# Altium PCB E3e-B2_ANGERS.PcbDoc
Units mil, origin at the board's own origin, x right, y up, seen from the top; angles counter-clockwise.
Board outline 5190 x 3405 mil, 2 copper layers (Top Layer, Bottom Layer); 19 components, 22 nets, 73 pads, 0 vias.
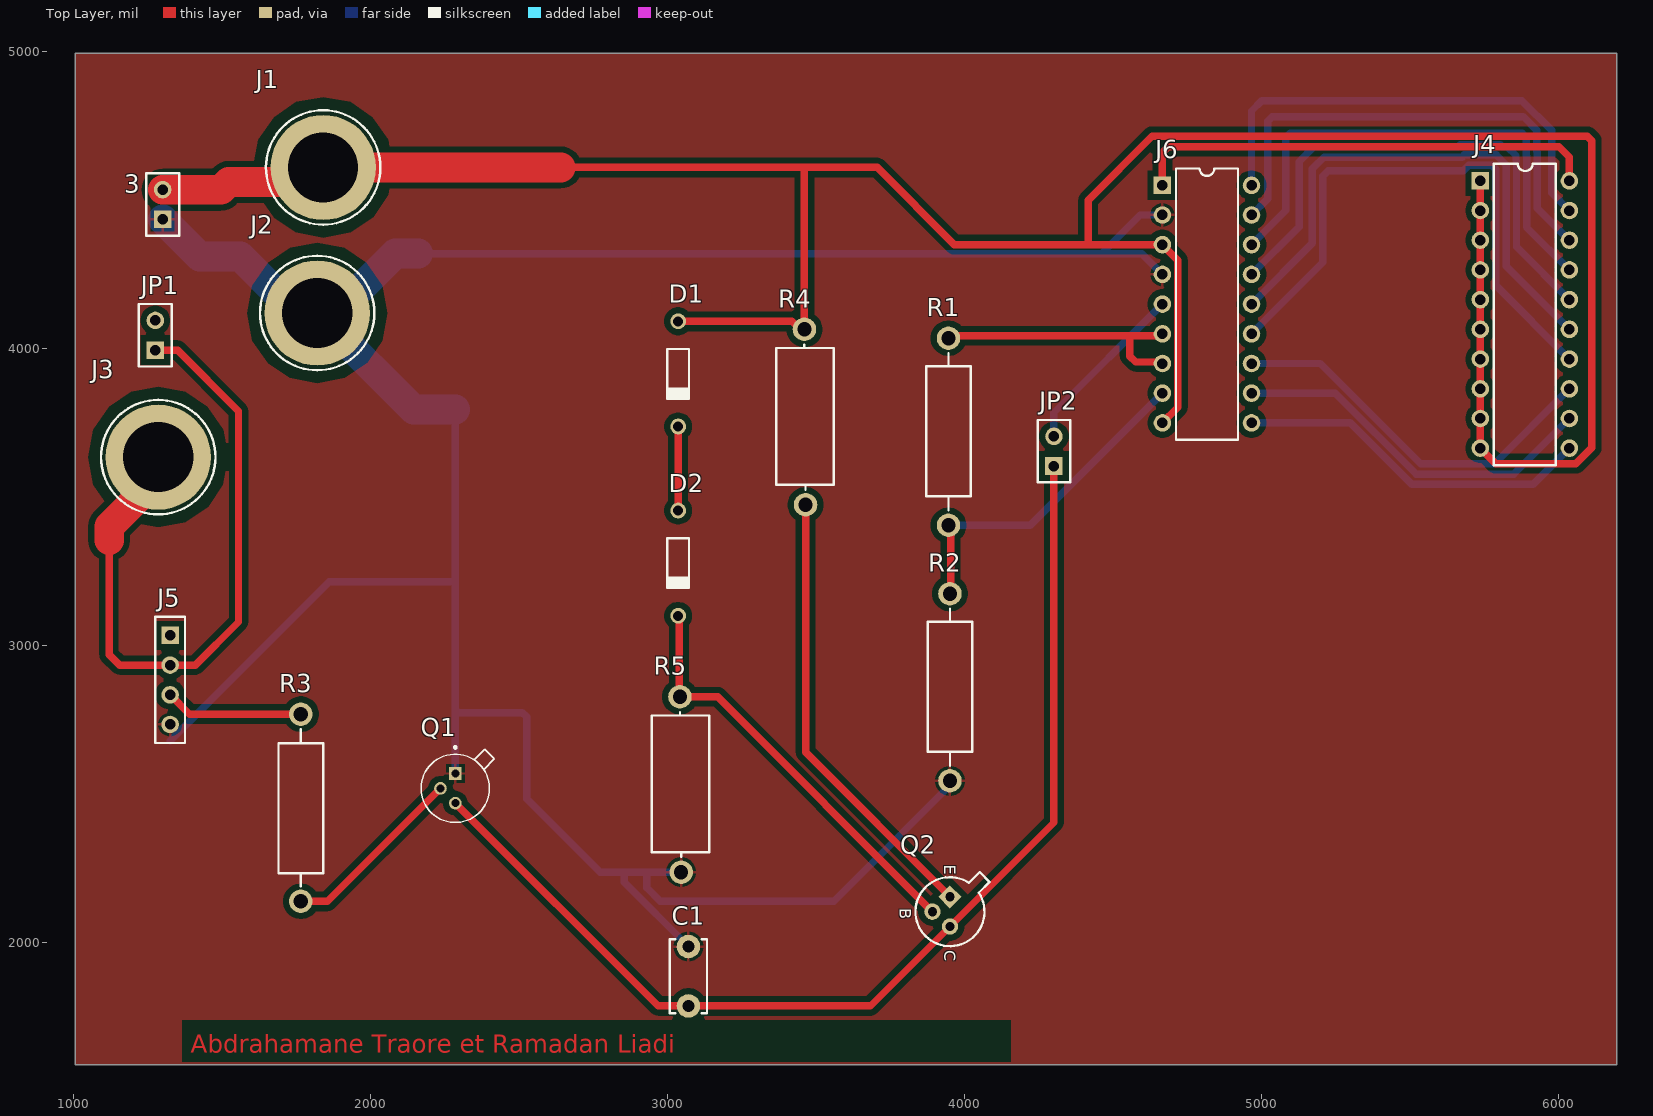
[diagram p0: Top Layer view]
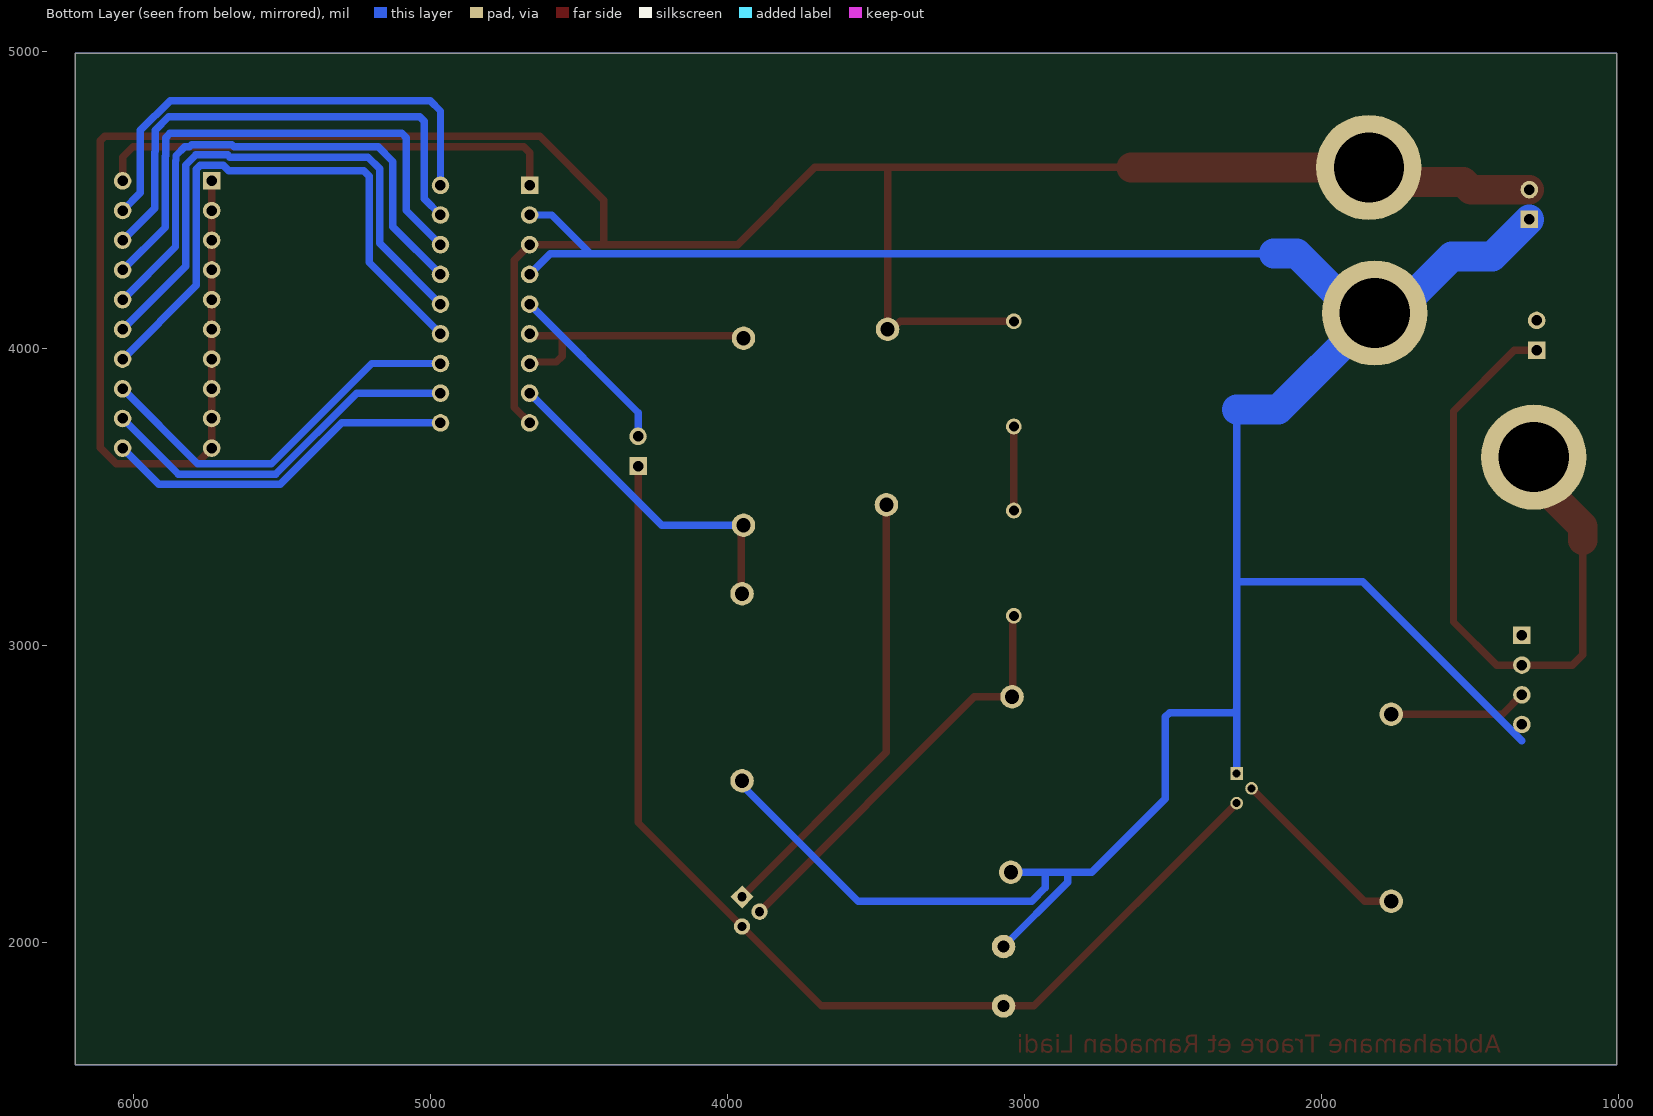
[diagram p1: Bottom Layer view, seen from below]
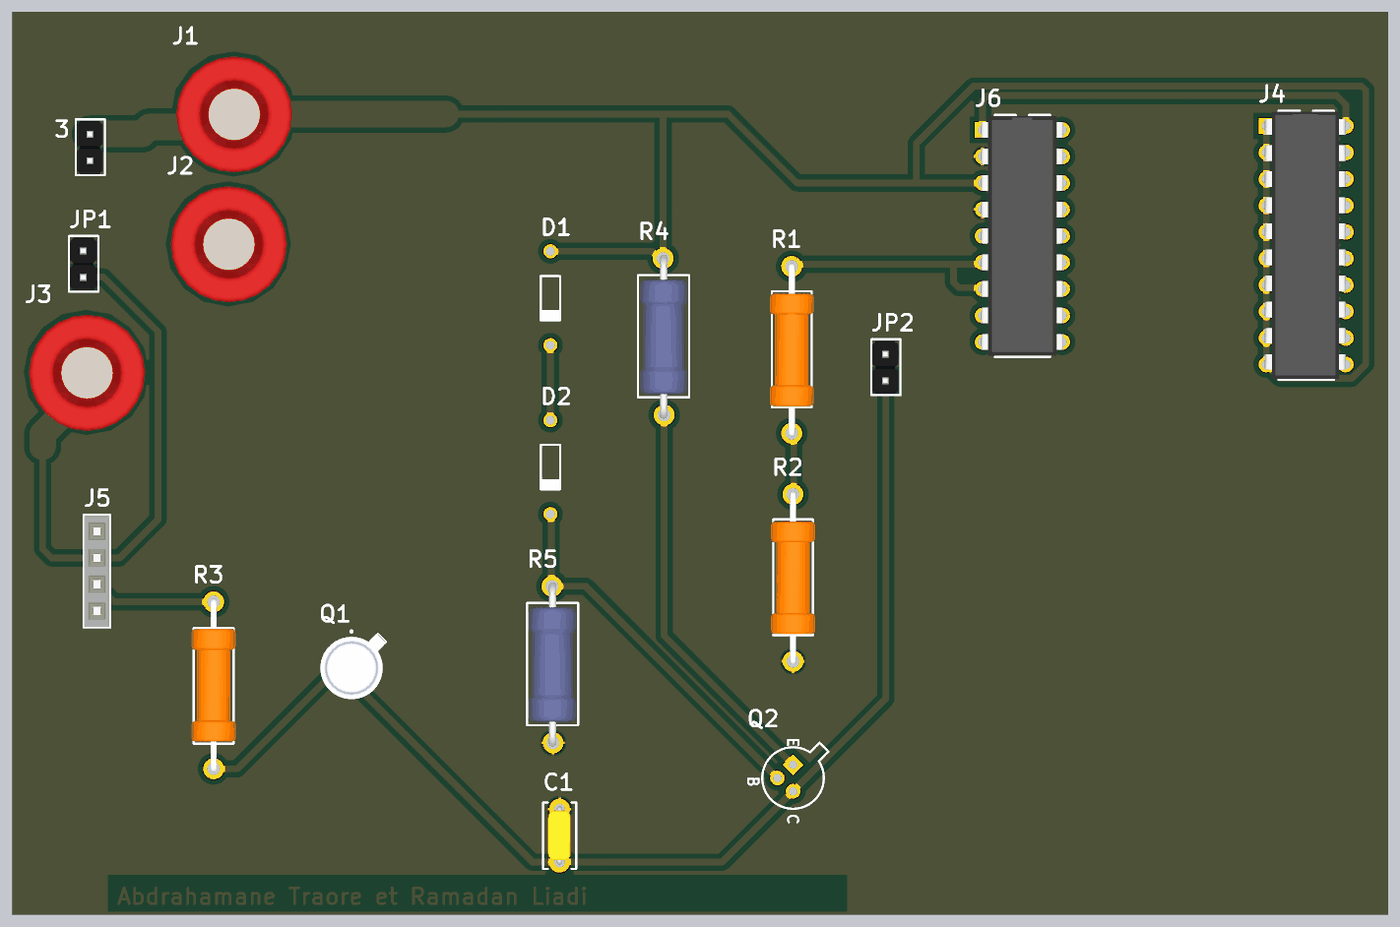
[diagram p2: 3D render of the assembled board from above, using the file's embedded part models]

## Layer stack, top to bottom
Top Solder: solder mask 0.4, Solder Resist, Dk 3.5
Top Layer: signal copper 1.4
Dielectric 1: dielectric 12.6, FR-4, Dk 4.8
Bottom Layer: signal copper 1.4
Bottom Solder: solder mask 0.4, Solder Resist, Dk 3.5

## Board outline
1005,1590 6195,1590 6195,4995 1005,4995

## Design rules (kind name [scope] priority, off if disabled: settings)
Clearance Clearance_1 [InNamedPolygon('Top Layer') Or InNamedPolygon('Bottom Lyer')] p1: gap=20 ignorepadtopadclearanceinfootprint=FALSE
Clearance [All] p2: gap=10 ignorepadtopadclearanceinfootprint=FALSE
PolygonConnect [All] p1: connectstyle=Relief reliefconductorwidth=10 reliefentries=4 polygonreliefangle="90 Angle" airgapwidth=10
RoutingVias [All] p1: holewidth=28 width=50 viastyle="Through Hole" minholewidth=28 minwidth=50 maxholewidth=28 maxwidth=50
SolderMaskExpansion [All] p1: expansion=4 istentingtop=FALSE
SupplyNets "Schematic Supply Nets_1" [InNet('+5')] p1: voltage=0.000
SupplyNets "Schematic Supply Nets" [InNet('GND')] p2: voltage=0.000
Width [All] p1: maxlimit=200 minlimit=10 preferedwidth=25
30 further rules are at their usual default settings.

## Components (designator, comment, footprint, x,y, rotation, side; value= is the part's Value field where it differs from the comment)
3 "JUMPER2" BARRETTE_2_M_D 1300,4435 r90 top
C1 "CONDENSATEUR_CER_RAD_5.08" CONDENSATEUR_CERAMIQUE_RADIAL_5.08 3069.67,1987.51 r270 top value=10nF
D1 "1N4148" NXP-SOD27-2_V 3035,3915 r270 top
D2 "1N4148" NXP-SOD27-2_V 3035,3277.83 r270 top
J1 "DOUILLE BANANE 4mm" DOUILLE_BANANE_4mm 1840,4610 r0 top
J2 "DOUILLE BANANE 4mm" DOUILLE_BANANE_4mm 1820,4120 r0 top
J3 "" DOUILLE_BANANE_4mm 1285,3635 r0 top
J4 "COMPOSANT_20_BROCHES" DIP20_PAS=2.54_LARG=7.62_LONG=25.6 5885,4115 r270 top
J5 "BARRETTE_4 CONTACTS_1 RANGEE_FEMELLE_DROITE" BARRETTE_4_F_D 1325,3035 r270 top
J6 "COMPOSANT_18_BROCHES" DIP18_PAS=2.54_LARG=7.62_LONG=23 4815,4150 r270 top
JP1 "JUMPER2" BARRETTE_2_M_D 1275,3995 r90 top
JP2 "JUMPER2" BARRETTE_2_M_D 4300,3605 r90 top
Q1 "2N2222" TO127P584H533-3 2285,2520 r270 top
Q2 "." TRANSISTOR_BIPOL_TO18_EBC 3950,2105 r270 top
R1 "RESISTANCE_AXIALE_1/4W" RESISTANCE_1/2W 3945,3925 r90 top value=1.21K
R2 "RESISTANCE_AXIALE_1/4W" RESISTANCE_1/2W 3950,3065 r90 top value=3.83K
R3 "RESISTANCE_AXIALE_1/4W" RESISTANCE_1/2W 1765,2250 r270 top value=1K
R4 "RESISTANCE_AXIALE_1W" RESISTANCE_1W 3463.94,3521.69 r90 top value=4.7K
R5 "RESISTANCE_AXIALE_1W" RESISTANCE_1W 3045,2285 r90 top value=4.7K

## Footprints (in the part's own frame and the unit in brackets; to place one, negate y for a bottom-side part, rotate by r counter-clockwise, add the part's x,y. Pads: shape width x height; smd on the part's side, far side on the other; paste and mask are expansions set on the pad)
BARRETTE_2_M_D [mm] "BARRETTE 2 CONTACTS ; 1 RANGEE ; DROITE ; MALE ; ESPACEMENT BROCHES = 2.54 mm"
  rect 1.5x1.5 hole 0.9: 1(0,0)
  round 1.5 hole 0.9: 2(2.54,0)
  silkscreen extent -1.4,-1.4 3.94,1.4, body extent -1.3,-1.2 3.78,1.3, height 8.55
BARRETTE_4_F_D [mm] "BARRETTE 4 CONTACTS ; 1 RANGEE ; DROITE ; FEMELLE ; ESPACEMENT BROCHES = 2.54 mm"
  rect 1.5x1.5 hole 0.9: 1(0,0)
  round 1.5 hole 0.9: 2(2.54,0) 3(5.08,0) 4(7.62,0)
  silkscreen extent -1.6,-1.27 9.2,1.27, body extent -1.53,-1.21 9.13,1.2, height 8.5
CONDENSATEUR_CERAMIQUE_RADIAL_5.08 [mil] "CONDENSATEUR TRAVERSANT CERAMIQUE RADIAL ; DIMENSIONS : 3.17mm x 5.08mm"
  round 79 hole 40: 1(0,0) 2(200,0)
  silkscreen extent -25,-63 225,63, body extent -11,-43 209,42, height 148
DIP18_PAS=2.54_LARG=7.62_LONG=23 [mm] "Dual-In-Line Plastic Packages (PDIP) ; 18 Leads ; Row Spacing = 7.62 mm ; Pitch = 2.54 mm"
  rect 1.5x1.5 hole 0.9: 1(-10.16,-3.81)
  round 1.5 hole 0.9: 2(-7.62,-3.81) 3(-5.08,-3.81) 4(-2.54,-3.81) 5(0,-3.81) 6(2.54,-3.81) 7(5.08,-3.81) 8(7.62,-3.81) 9(10.16,-3.81) 10(10.16,3.81) 11(7.62,3.81) 12(5.08,3.81) 13(2.54,3.81) 14(0,3.81) 15(-2.54,3.81) 16(-5.08,3.81) 17(-7.62,3.81) 18(-10.16,3.81)
  silkscreen extent -11.6,-2.65 11.6,2.65, body extent -11.5,-3.95 11.49,3.92, height 5.08
DIP20_PAS=2.54_LARG=7.62_LONG=25.6 [mm] "Dual-In-Line Plastic Packages (PDIP) ; 20 Leads ; Row Spacing = 7.62 mm ; Pitch = 2.54 mm"
  rect 1.5x1.5 hole 0.9: 1(-11.43,-3.81)
  round 1.5 hole 0.9: 2(-8.89,-3.81) 3(-6.35,-3.81) 4(-3.81,-3.81) 5(-1.27,-3.81) 6(1.27,-3.81) 7(3.81,-3.81) 8(6.35,-3.81) 9(8.89,-3.81) 10(11.43,-3.81) 11(11.43,3.81) 12(8.89,3.81) 13(6.35,3.81) 14(3.81,3.81) 15(1.27,3.81) 16(-1.27,3.81) 17(-3.81,3.81) 18(-6.35,3.81) 19(-8.89,3.81) 20(-11.43,3.81)
  silkscreen extent -12.9,-2.65 12.9,2.65, body extent -12.8,-3.96 12.8,3.8, height 4.5
DOUILLE_BANANE_4mm [mm] "DOUILLE BANANE ; DIAMETRE PASSAGE CONTACT = 4 mm ; DIAMETRE PERCAGE = 6 mm"
  round 9 hole 6: 1(0,0)
  Top Layer pour cut-out: -5.55,2.35 -4.2,4.3 -2.3,5.6 0,6 2.3,5.6 4.2,4.3 5.55,2.35 6,0 5.55,-2.35 4.3,-4.25 2.35,-5.55 0,-6 -2.35,-5.55 -4.2,-4.3 -5.55,-2.35 -6,0
  Bottom Layer pour cut-out: -5.55,2.35 -4.2,4.3 -2.3,5.6 0,6 2.3,5.6 4.2,4.3 5.55,2.35 6,0 5.55,-2.35 4.3,-4.25 2.35,-5.55 0,-6 -2.35,-5.55 -4.2,-4.3 -5.55,-2.35 -6,0
  silkscreen extent -4.89,-4.89 4.89,4.89, body extent -5.5,-5.6 5.63,5.53, height 4.79
NXP-SOD27-2_V [mm] "SOD27, 2-Leads, Dia 1.85mm, Body Length 4.25mm, Pin Spacing 9mm"
  round 1.35 hole 0.85: 1(-4.5,0) 2(4.5,0)
  silkscreen extent -2.12,-0.93 2.12,0.92, body extent -4.78,-0.93 4.78,0.92, height 1.85
RESISTANCE_1/2W [mil] "RESISTANCE TRAVERSANTE 0.5W ; DIAMETRE : 3.8mm ; LONGUEUR : 10.16mm ; PAS : 15.24mm"
  round 79 hole 48: 1(-519.68,0) 2(110.24,0)
  silkscreen extent -469,-75 59,75, body extent -531,-83 122,83, height 169
RESISTANCE_1W [mil] "RESISTANCE 1W ; DIAMETRE : 5.08mm ; LONGUEUR : 12mm ; PAS : 17.78mm"
  round 79 hole 48: 1(-47.24,0) 2(543.31,3.94)
  silkscreen extent 4,-94 492,98, body extent -61,-87 557,91, height 183
TO127P584H533-3 [mm]
  rect 1.08x1.08 / inner round 1.08 / far side rect 1.08x1.08 hole 0.68: 1(-1.27,0)
  round 1.08 hole 0.68: 2(0,-1.27) 3(1.27,0)
  silkscreen extent -3.6,-2.92 2.92,3.34, body extent -3.27,-2.9 2.9,3.27, height 18
TRANSISTOR_BIPOL_TO18_EBC [mm] "BOITIER TO18 ; DIAMETRE : 6mm ; ESPACEMENT BROCHES 1-3 : 2.54mm ; PERCAGE : 0.6mm"
  rect 1.4x1.4 hole 0.8 rot 45: 1(-1.27,0)
  round 1.4 hole 0.8: 2(0,-1.5) 3(1.27,0)
  silkscreen extent -3.39,-2.95 2.95,3.39

## Part data
3 JP1 JP2: library part CMP-118-000282-1, "BARRETTE 2 CONTACTS 1 RANGEE MALE DROITE", Design Item ID=JUMPER2, Source=connecteurs.SchLib
C1: library part CMP-001-00223-1, "CONDENSATEUR TRAVERSANT CERAMIQUE RADIAL 5.08mm", Design Item ID=CONDENSATEUR_CER_RAD_5.08, Source="composants passifs.SchLib", Type=RADIAL_5.08
D1 D2: library part CMP-004-00000-2, "High Speed Diode, 100 V, 0.45 A, -65 to 175 degC, 2-Pin SOD27, RoHS, Bulk", Case/Package=DO, Forward Current=300mA, Forward Voltage=1V, Manufacturer=Fairchild, Max Operating Temperature=175°C, Max Surge Current=4A, Min Operating Temperature=-65°C, Package Quantity=2000, Package Reference=SOD27, Peak Reverse Current=5uA, Power=500mW, Datasheet URL=http://www.nxp.com/documents/data_sheet/1N4148_1N4448.pdf, Datasheet Version=Aug-04, Diameter=1.91mm, Elements=1, Manufacturer URL=https://www.fairchildsemi.com/, Package URL=http://www.nxp.com/documents/data_sheet/1N4148_1N4448.pdf, Packaging=Bulk, Pins=2, Recovery Time=4ns, RoHS Compliant=True
J1 J2: library part DOUILLE_BANANE_4mm, "DOUILLE BANANE 4 mm", Type=BANANE_4mm
J3: library part CMP-118-000026-1, "DOUILLE BANANE 4 mm", Design Item ID=DOUILLE_BANANE_4mm, Source=connecteurs.SchLib, Type=BANANE_4mm
J4: library part SYMBOLE_COMPOSANT_20_BROCHES, Type=BARGRAPH_LEDS
J5: "BARRETTE 4 CONTACTS 1 RANGEE FEMELLE DROITE", Type=SR_04
J6: library part SYMBOLE_COMPOSANT_18_BROCHES, Type=LM3914
Q1: library part CMP-148-000000-1, "Bipolar (BJT) Transistor NPN 50V 800mA 300mW Surface Mount Ceramic SMD", Availability="In Stock", Component Type=Standard, Design Item ID=2N2222, MF="ON Semiconductor", MP=2N2222, Pin Count=3, Price=None, Purchase-URL=https://pricing.snapeda.com/search/part/2N2222/?ref=eda, SnapEDA_Link=https://www.snapeda.com/parts/2N2222/Onsemi/view-part/?ref=snap, Source=2N2222.SchLib
Q2: library part CMP-328-000034-1, "TRANSISTOR PNP TO18_EBC : 2N2907", Design Item ID="TRANSISTOR_PNP_TO18_EBC : 2N2907", Source="composants actifs.SchLib", Type=2N2907
R1 R2 R3: "RESISTANCE TRAVERSANTE AXIALE 1/4W"
R4 R5: library part CMP-009-00186-1, "RESISTANCE TRAVERSANTE AXIALE 1W", Design Item ID=RESISTANCE_AXIALE_1W, Source="composants passifs.SchLib"

## Nets (pads, with @x,y where several pads share a name; then routed paths per layer and width w, separated by ;. In a path a pad name is that pad's centre, name@x,y a point inside that pad or via, vN(x,y) a via of type N, cw(c..) or ccw(c..) an arc to the next point about the centre after c; other vN are vias at no path point)
+5: 3.2 D1.1 J1.1 J4.1 J4.2 J4.3 J4.4 J4.5 J4.6 J4.7 J4.8 J4.9 J4.10 J6.3 J6.9 R4.2 | length 9420.9
  Top Layer w25: 2640,4610 3460,4610 ; D1.1 3418.22,4092.17 3445.39,4065 R4.2 3460,4610 ; J6.9 4717.03,3802.03 4717.03,4297.97 J6.3 4415,4350 ; J4.1 J4.2 J4.3 J4.4 J4.5 J4.6 J4.7 J4.8 J4.9 J4.10 5787.03,3612.97 6056.55,3612.97 6110,3666.42 6110,4700.36 6095.36,4715 4630,4715 4415,4500 4415,4350 ; 3460,4610 3705,4610 3965,4350 4415,4350
  Top Layer w100: 3.2 1496.18,4535 1522.51,4561.34 1791.34,4561.34 J1.1 2640,4610
GND: 3.1 C1.1 J2.1 J5.4 J6.2 J6.4 Q1.1 R2.1 R5.1 | length 9585.1
  Bottom Layer w25: 1325,2680 1860,3215 2285,3215 ; 2160,4320 4460,4320 ; Q1.1 2285,2785 ; 2285,3795 2285,3215 ; R5.1 2935,2237.76 ; C1.1 2853.62,2203.56 2853.62,2237.76 ; R2.1@3960,2540.32 3559.68,2140 2975,2140 2930,2185 2930,2232.76 2935,2237.76 ; J6.4 4595,4320 4460,4320 ; J6.2 4590,4450 4460,4320 ; 2285,2785 2295,2775 2510.36,2775 2525,2760.36 2525,2485 2772.24,2237.76 2853.62,2237.76 ; 2285,2785 2285,3215 ; 2853.62,2237.76 2935,2237.76
  Bottom Layer w100: 3.1 1424.91,4310.09 1561.09,4310.09 1751.18,4120 J2.1 1882.68,4120 2082.68,4320 2160,4320 ; J2.1@1851.34,4088.66 2145,3795 2285,3795
NetC1_2: C1.2 JP2.1 Q1.3 Q2.3 | length 3753.5
  Top Layer w25: Q1.3 2967.49,1787.51 C1.2 3682.51,1787.51 Q2.3 4300,2405 JP2.1
NetD1_2: D1.2 D2.1 | length 282.8
  Top Layer w25: D2.1 D1.2
NetD2_2: D2.2 Q2.2 R5.2 | length 1424.4
  Top Layer w25: D2.2 3038.03,3097.64 3038.03,2831.34 R5.2 3167.64,2828.31 Q2.2
NetJ3_1: J3.1 J5.2 JP1.1 | length 2342.8
  Top Layer w25: 1120,3380 1120,2970 1155,2935 J5.2 1410,2935 1555,3080 1555,3790 1350,3995 JP1.1
  Top Layer w100: 1120,3355 1120,3401.18 1285,3566.18 J3.1
NetJ4_11: J4.11 J6.10 | length 1206.3
  Bottom Layer w25: J6.10 5297.87,3750 5504.9,3542.97 5912.97,3542.97 J4.11
NetJ4_12: J4.12 J6.11 | length 1260.1
  Bottom Layer w25: J6.11 5247.37,3850 5519.4,3577.97 5847.97,3577.97 J4.12
NetJ4_13: J4.13 J6.12 | length 1314
  Bottom Layer w25: J6.12 5196.87,3950 5533.9,3612.97 5782.97,3612.97 J4.13
NetJ4_14: J4.14 J6.13 | length 1973.8
  Bottom Layer w25: J6.13 5205,4290 5205,4580 5223.51,4598.51 5677.64,4598.51 5696.15,4617.03 5773.85,4617.03 5787.03,4603.85 5787.03,4212.97 J4.14
NetJ4_15: J4.15 J6.14 | length 1866.9
  Bottom Layer w25: J6.14 5170,4355 5170,4605 5210,4645 5674.63,4645 5681.66,4652.03 5788.34,4652.03 5822.03,4618.34 5822.03,4277.97 J4.15
NetJ4_16: J4.16 J6.15 | length 1775
  Bottom Layer w25: J6.15 5125,4410 5125,4630 5175,4680 5660.13,4680 5667.16,4687.03 5802.84,4687.03 5809.87,4680 5825.36,4680 5855.25,4650.1 5855.25,4634.62 5857.03,4632.84 5857.03,4342.97 J4.16
NetJ4_17: J4.17 J6.16 | length 1735.7
  Bottom Layer w25: J6.16 5080,4465 5080,4710.36 5094.64,4725 5875.61,4725 5890.25,4710.36 5890.25,4649.12 5892.03,4647.34 5892.03,4407.97 J4.17
NetJ4_18: J4.18 J6.17 | length 1683.7
  Bottom Layer w25: J6.17 5020,4505 5020,4765.36 5034.64,4780 5880.5,4780 5925.25,4735.25 5925.25,4663.61 5927.03,4661.84 5927.03,4472.97 J4.18
NetJ4_19: J4.19 J6.18 | length 1610.8
  Bottom Layer w25: J6.18 4965,4800 5000,4835 5875,4835 5975,4735 5975,4525 J4.19
NetJ4_20: J4.20 J6.1 | length 1582.8
  Top Layer w25: J6.1 4665,4660 4685,4680 6000,4680 6035,4645 J4.20
NetJ5_3: J5.3 R3.1 | length 467.1
  Top Layer w25: J5.3 1390.32,2769.68 R3.1
NetJ6_5: J6.5 JP2.2 | length 596.2
  Bottom Layer w25: JP2.2 4300,3785 J6.5
NetJ6_6: J6.6 J6.7 R1.2 | length 915
  Top Layer w25: R1.2 3953.25,4043.48 4555,4043.48 ; J6.7 4660,3955 4575,3955 4555,3975 4555,4043.48 ; J6.6 4658.48,4043.48 4555,4043.48
NetJ6_8: J6.8 R1.1 R2.2 | length 1145.5
  Top Layer w25: R1.1 3952.5,3397.82 3952.5,3177.74 R2.2@3960,3170.24
  Bottom Layer w25: R1.1 4220.31,3405.32 J6.8
NetQ1_2: Q1.2 R3.2 | length 627.5
  Top Layer w25: R3.2 1854.76,2139.76 Q1.2
NetQ2_1: Q2.1 R4.1 | length 1520.8
  Top Layer w25: R4.1 3463.94,2641.06 Q2.1
pads on no net: J5.1 JP1.2

## Polygon pours and split planes (outlines as drawn)
GND on Top Layer "Top Layer" (solid, pour order 0): 1005,4995 6195,4995 6195,1590 1005,1590
GND on Bottom Layer "Bottom Lyer" (solid, pour order 1): 1005,4995 6195,4995 6195,1590 1005,1590

## Other copper
Top Layer:
  text "Abdrahamane Traore et Ramadan Liadi" at 1395,1630 h60

## Silkscreen, mask and mechanical layers (free items; w line width, h text height)
Mechanical 1:
  the board outline again, w47.24
Mechanical 15:
  the board outline again, w10

## Text inside footprints (layer, text, board x,y; h text height)
Q2: Top Overlay "E" at 3930.32,2262.48 h39.37 r270; Top Overlay "B" at 3780.71,2116.81 h39.37 r270; Top Overlay "C" at 3930.32,1975.08 h39.37 r270